# Altium PCB pcb_amigo_perto.PcbDoc
Units mm, origin at the board's own origin, x right, y up, seen from the top; angles counter-clockwise.
Board outline 25 x 35 mm, 2 copper layers (Top Layer, Bottom Layer); 6 components, 7 nets, 38 pads, 0 vias.
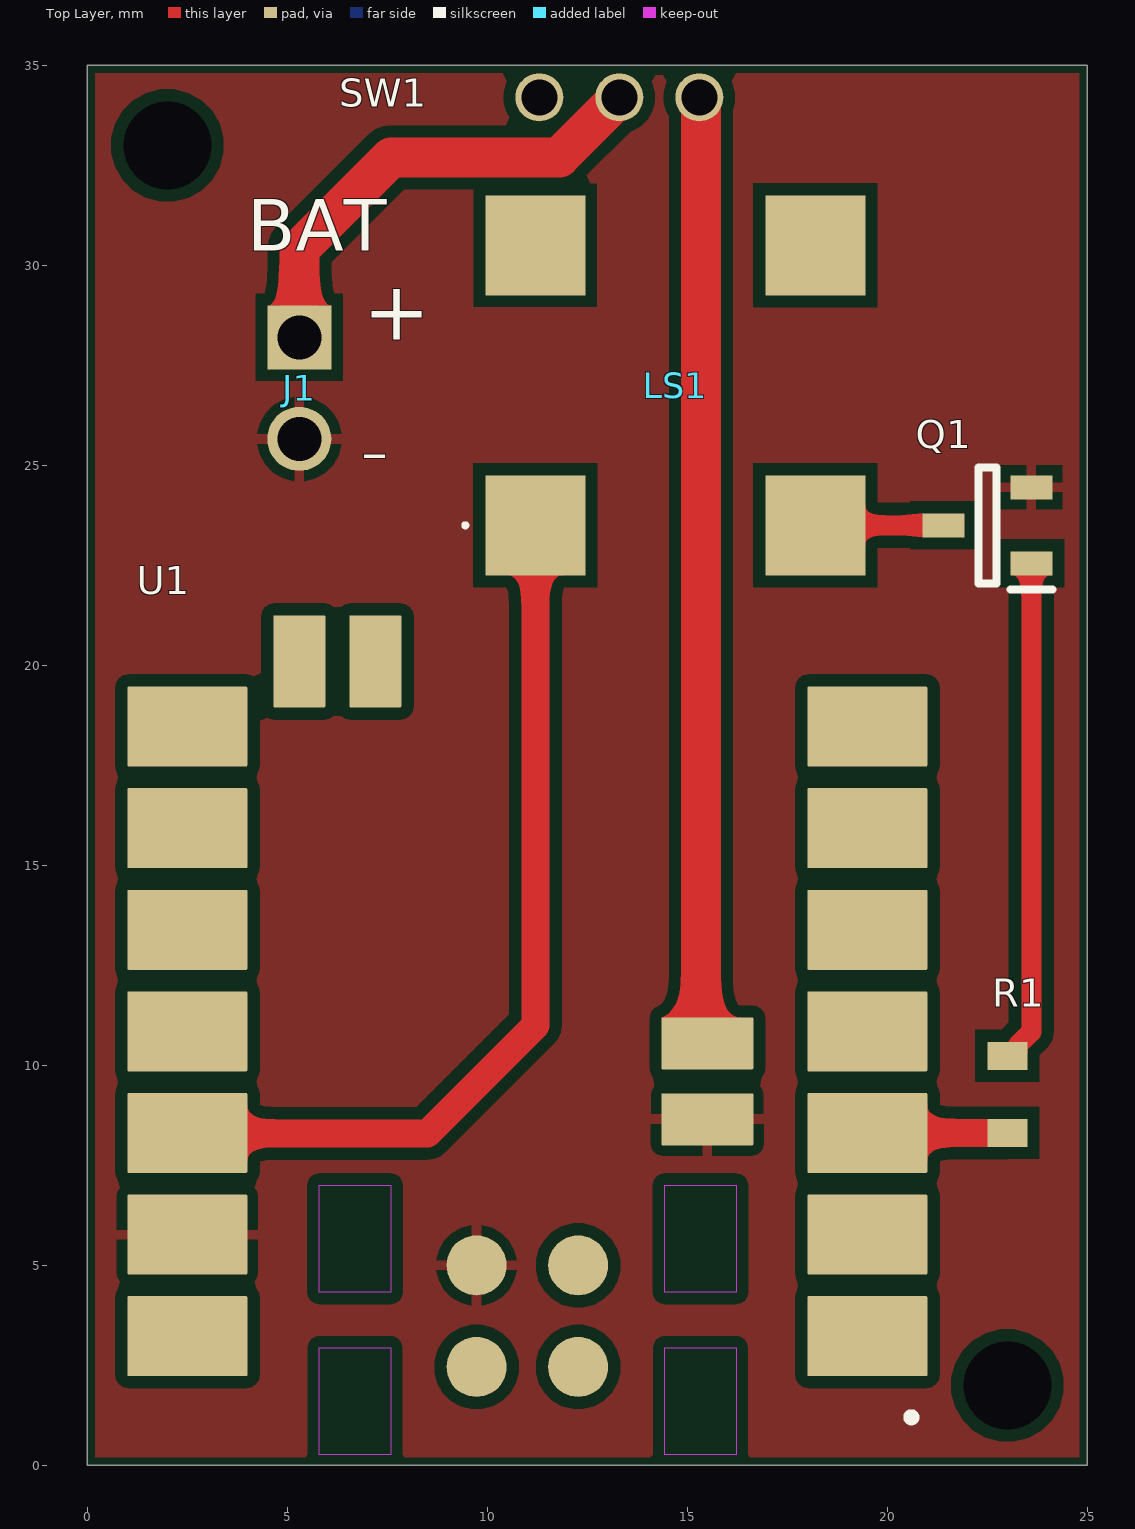
[diagram p0: Top Layer view]
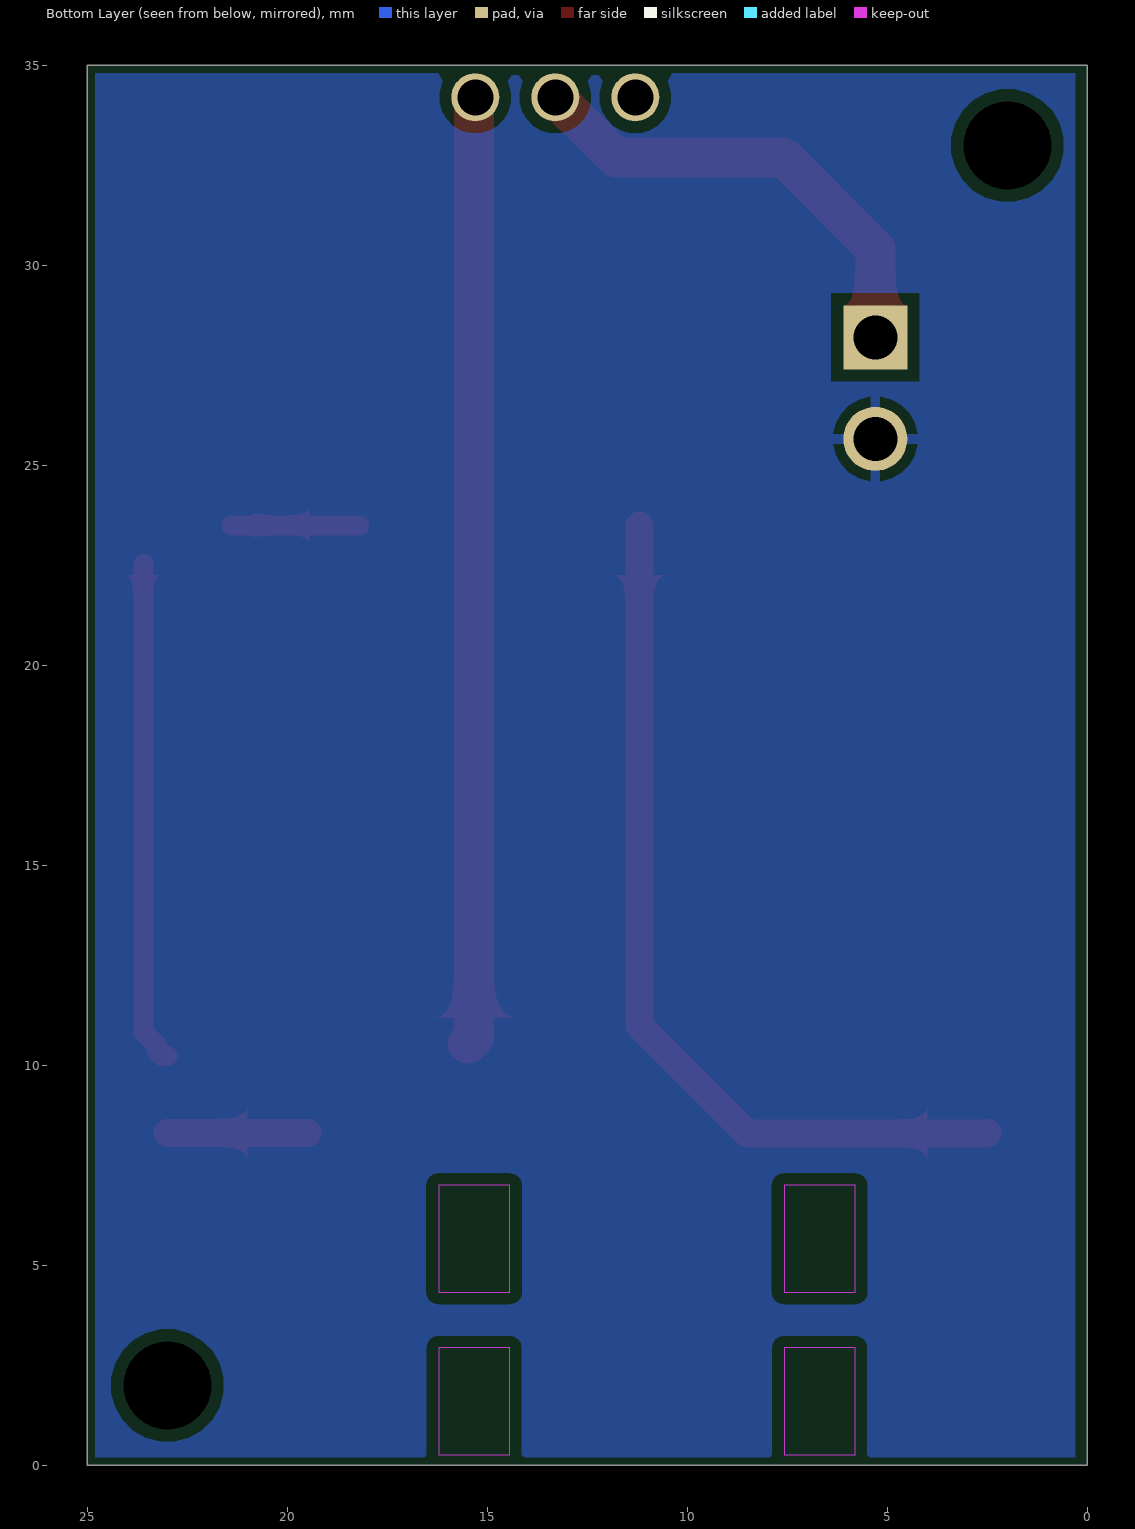
[diagram p1: Bottom Layer view, seen from below]
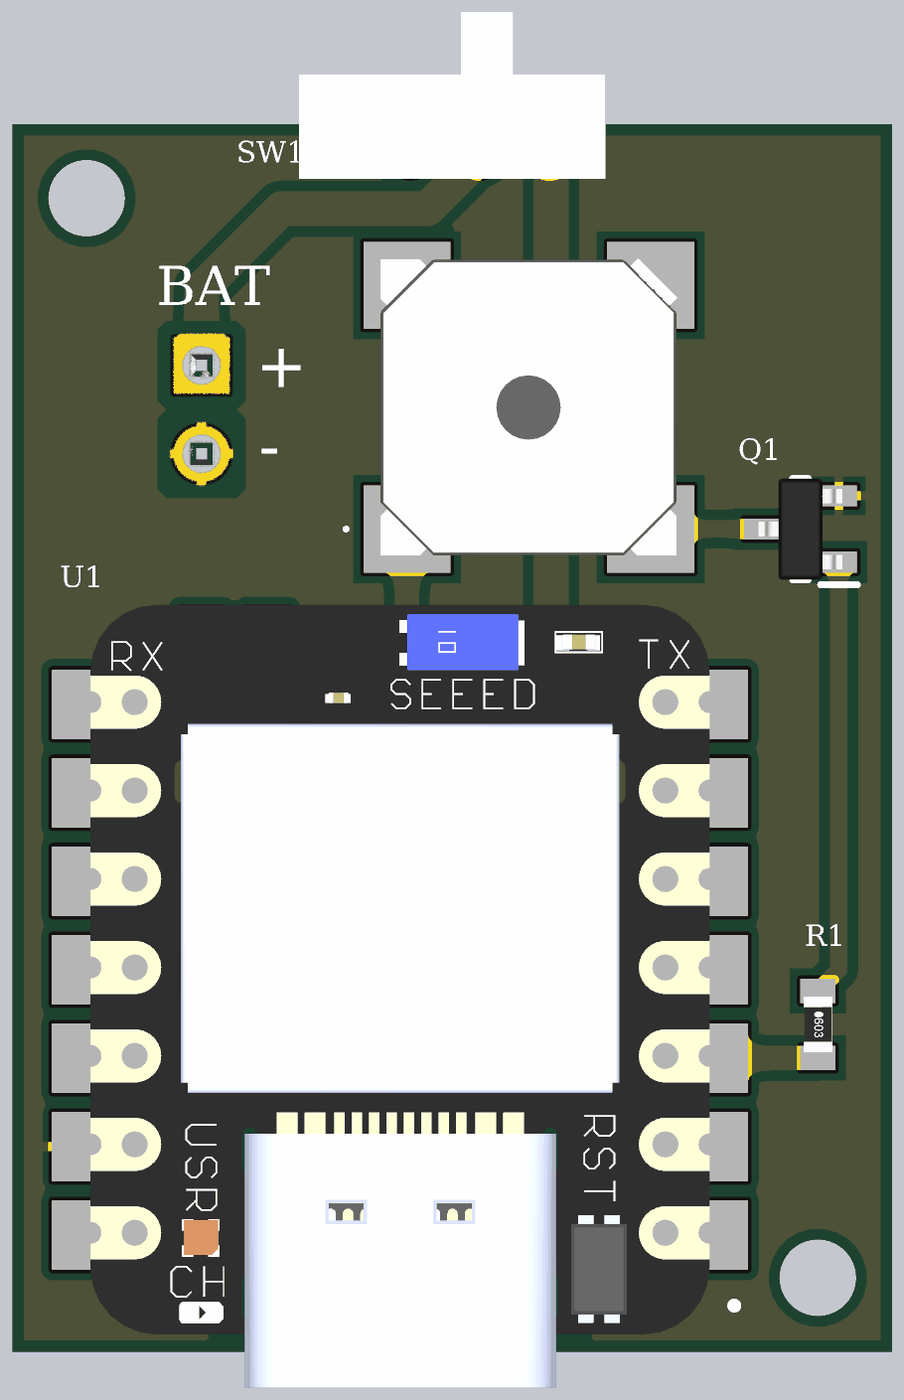
[diagram p2: 3D render of the assembled board from above, using the file's embedded part models]

## Layer stack, top to bottom
Top Solder: solder mask 0.0102, Solder Resist, Dk 3.5
Top Layer: signal copper 0.0356
Dielectric 1: dielectric 0.32, FR-4, Dk 4.8
Bottom Layer: signal copper 0.0356
Bottom Solder: solder mask 0.0102, Solder Resist, Dk 3.5

## Board outline
0,0 0,35 25,35 25,0

## Design rules (kind name [scope] priority, off if disabled: settings)
Clearance Clearance_1 [InNet('GND') vs OnLayer('Board Outline')] p1: gap=0.3 ignorepadtopadclearanceinfootprint=FALSE
Clearance [All] p2: gap=0.3 ignorepadtopadclearanceinfootprint=FALSE
ComponentClearance ComponentClearance_1 [InComponent('LS') vs InComponent('LS2')] p1: gap=0 collisioncheckmode=3 verticalgap=0 showdistances=FALSE
ComponentClearance [All] p2: gap=0.254 collisioncheckmode=3 verticalgap=0.254 showdistances=FALSE
PolygonConnect [All] p1: thpad.connectstyle=Relief thpad.reliefconductorwidth=0.254 thpad.reliefentries=4 thpad.polygonreliefangle="90 Angle" thpad.airgapwidth=0.254 smdpad.connectstyle=Relief smdpad.reliefconductorwidth=0.254 smdpad.reliefentries=4 smdpad.polygonreliefangle="90 Angle" smdpad.airgapwidth=0.254 via.connectstyle=Direct via.reliefconductorwidth=0.254 via.reliefentries=4 via.polygonreliefangle="90 Angle" via.airgapwidth=0.254
RoutingVias [All] p1: holewidth=0.711 width=1.27 viastyle="Through Hole" minholewidth=0.711 minwidth=1.27 maxholewidth=0.711 maxwidth=1.27
SilkToSolderMaskClearance [IsPad] p1: minsilkscreentomaskgap=0.2 clearancetoexposedcopper=TRUE
SolderMaskExpansion [All] p1: expansion=0.102 istentingtop=FALSE
SupplyNets "Schematic Supply Nets_2" [InNet('+3V3')] p1: voltage=0.000
SupplyNets "Schematic Supply Nets_1" [InNet('GND')] p2: voltage=0.000
UnpouredPolygon [All] p1: allowunpoured=TRUE allowshelved=TRUE
Width [All] p1: maxlimit=1 minlimit=0.2 preferedwidth=0.3
27 further rules are at their usual default settings.

## Classes and differential pairs
component class main: J1 Q1 R1 SW1 U1

## Components (designator, comment, footprint, x,y, rotation, side; value= is the part's Value field where it differs from the comment)
J1 "HEADER 1X2" "HEADER 1X2" 5.3,28.2 r270 top
LS1 "BUZZER" CMT-8504-100-SMT-TR 14.7,27 r90 top
Q1 "BC817-40LT1G" BC817-40LT1G 22.5,23.5 r180 top
R1 "Resistor" RES0603 23,9.274 r270 top value=330R
SW1 "MSK-03E" MSK-03E 13.3,34.2 r180 top locked
U1 "102010448" 102010448 11,10.848 r180 top

## Footprints (in the part's own frame and the unit in brackets; to place one, negate y for a bottom-side part, rotate by r counter-clockwise, add the part's x,y. Pads: shape width x height; smd on the part's side, far side on the other; paste and mask are expansions set on the pad)
102010448 [mm]
  rrect3% 3x2 smd: 0(-8.5,7.62) 1(-8.5,5.08) 2(-8.5,2.54) 3(-8.5,0) 3V3(8.5,2.54) 4(-8.5,-2.54) 5(-8.5,-5.08) 6(-8.5,-7.62) 7(8.5,-7.62) 8(8.5,-5.08) 9(8.5,-2.54) 10(8.5,0) GND(8.5,5.08) VUSB(8.5,7.62)
  rrect4% 2.3x1.3 smd: BAT_N(-4.5,2.2) BAT_P(-4.5,0.3)
  rrect4% 1.3x2.3 smd: NFC1(3.8,-9.25) NFC2(5.7,-9.25)
  round 1.5 smd: TP1(1.27,5.85) TP2(-1.27,5.85) TP3(1.27,8.39) TP5(-1.27,8.39)
  Keep-Out Layer region: 5.197,7.915 3.419,7.915 3.419,10.582 5.197,10.582
  Keep-Out Layer region: 5.197,3.851 3.419,3.851 3.419,6.518 5.197,6.518
  Keep-Out Layer region: -3.439,3.851 -5.217,3.851 -5.217,6.518 -3.439,6.518
  Keep-Out Layer region: -3.439,7.915 -5.217,7.915 -5.217,10.582 -3.439,10.582
  silkscreen extent -9.7,9.55 -9.5,9.75, body extent -8.89,-10.48 8.89,12, height 4.46
BC817-40LT1G [mm]
  rect 1.05x0.6 smd: 1(-1.1,0.95) 2(-1.1,-0.95) 3(1.1,0)
  silkscreen extent -1.63,-1.45 0.23,1.6, body extent -1.2,-1.45 1.2,1.45, height 0.95
CMT-8504-100-SMT-TR [mm]
  rect 2.5x2.5 smd: 3(3.5,-3.5) 4(3.5,3.5) N(-3.5,-3.5) P(-3.5,3.5)
  silkscreen extent -3.55,5.2 -3.45,5.3, body extent -4.26,-4.27 4.27,4.26, height 4
"HEADER 1X2" [mm]
  rect 1.6x1.6 hole 1.1: 1(0,0)
  round 1.6 hole 1.1: 2(2.54,0)
  body extent -1.27,-1.27 3.81,1.27, height 8.54
MSK-03E [mm]
  round 1.2 hole 0.9: 1(-2,0) 2(0,0) 3(2,0)
  body extent -3.6,-4.15 5.2,0.65, height 2.03
RES0603 [mm] "Chip Resistor, Body 0603 IPC Low Density"
  rect 0.7x1 smd: 1(-0.965,0) 2(0.965,0)
  body extent -0.8,-0.41 0.8,0.41, height 0.45

## Part data
LS1: library part CMT-8504-100-SMT-TR, "AUDIO INDICATOR 5VDC 30MA 85DB", Manufacturer="Same Sky (Formerly CUI Devices)", Package=None, Availability=Unavailable, Component Description="BUZZER MAGNETIC 5V 0.34X0.34 SMD", manufaturer part number=CMT-8504-100-SMT-TR, MF="{'manufacturer': u'PUI Audio, Inc.'}", MP=AI-1223-TWT-3V-2-R, Price=None
Q1: "Transistor BJT NPN", Arrow Part Number=BC817,215, Manufacturer=onsemi, Manufacturer_Name=Nexperia, Mouser Part Number=771-BC817-T/R, Arrow Price/Stock=https://www.arrow.com/en/products/bc817215/nexperia?utm_currency=USD&region=nac, Component Description="TRANS NPN 45V 0.5A SOT23-3", Datasheet Link=https://assets.nexperia.com/documents/data-sheet/BC817_SER.pdf, Height=1.1mm, Manufacturer_Part_Number=BC817,215, manufaturer part number=BC817-40LT1G, Mouser Price/Stock=https://www.mouser.co.uk/ProductDetail/Nexperia/BC817215?qs=me8TqzrmIYXz7pTxqNMGNQ%3D%3D
R1: library part CRCW0603330RJNEA, "Generic Resistor", Manufacturer="VISHAY DALE", Component Description="RES SMD 330R 5% 1/10W 0603", manufaturer part number=CRCW0603330RJNEA
SW1: Manufacturer=-, Component Description="SWITCH 1P2T 2MM", manufaturer part number=MSK-03E
U1: "- nRF52840 Transceiver; Bluetooth® 5.x Evaluation Board", Manufacturer="Seeed Technology Co., Ltd", Package=None, Check_prices=https://www.snapeda.com/parts/102010448/Seeed+Technology+Co.%252C+Ltd/view-part/?ref=eda, Component Description="XIAO NRF52840", manufaturer part number=102010448, MF="Seeed Technology Co., Ltd", MP=102010448, SnapEDA_Link=https://www.snapeda.com/parts/102010448/Seeed+Technology+Co.%252C+Ltd/view-part/?ref=snap
J1: Component Description="CONN HEADER VERT 2POS 2.54MM", manufaturer part number="HEADER 1X2"

## Free pads (board coordinates)
  round 0 hole 2.2 unplated: 5(2,33) 7(23,2)

## Nets (pads, with @x,y where several pads share a name; then routed paths per layer and width w, separated by ;. In a path a pad name is that pad's centre, name@x,y a point inside that pad or via, vN(x,y) a via of type N, cw(c..) or ccw(c..) an arc to the next point about the centre after c; other vN are vias at no path point)
+3V3: LS1.P U1.3V3 | length 22.3
  Top Layer w0.7: U1.3V3 2.508,8.3 8.5,8.3 11.2,11 LS1.P
+V_BAT: SW1.1 U1.BAT_P | length 23.7
  Top Layer w1: SW1.1 15.338,34.162 15.338,10.698 15.488,10.548 U1.BAT_P
Buzzer: R1.2 U1.2 | length 3.5
  Top Layer w0.7: U1.2 R1.2
GND: J1.2 Q1.2 U1.BAT_N U1.GND U1.TP1
NetJ1_1: J1.1 SW1.2 | length 11.8
  Top Layer w1: J1.1 5.3,30.407 7.593,32.7 11.8,32.7 SW1.2
NetLS1_N: LS1.N Q1.3 | length 3.2
  Top Layer w0.5: LS1.N Q1.3
NetQ1_1: Q1.1 R1.1 | length 12.6
  Top Layer w0.5: R1.1 23.15,10.239 23.25,10.339 23.25,10.489 23.6,10.839 Q1.1
pads on no net: LS1.3 LS1.4 SW1.3 U1.0 U1.1 U1.3 U1.4 U1.5 U1.6 U1.7 U1.8 U1.9 U1.10 U1.NFC1 U1.NFC2 U1.TP2 U1.TP3 U1.TP5 U1.VUSB

## Polygon pours and split planes (outlines as drawn)
GND on Top Layer "GND_L01_P000" (solid, remove dead copper, pour order 0): 24.8,34.8 0.2,34.8 0.2,0.2 24.8,0.2
GND on Bottom Layer "GND_L02_P001" (solid, remove dead copper, pour order 1): 0.3,0.2 24.8,0.2 24.8,34.8 0.3,34.8

## Silkscreen, mask and mechanical layers (free items; w line width, h text height)
Top Overlay:
  text "BAT" at 4.002,29.937 h2.2
  text "+" at 6.9,27.649 h2.5
  text "-" at 7.546,26.206 h2.5 r180
Board Outline:
  the board outline again, w0.254